# Altium PCB fanap.PcbDoc
Units mil, origin at the board's own origin, x right, y up, seen from the top; angles counter-clockwise.
Board outline 3111.08 x 2480.81 mil, 2 copper layers (Top Layer, Bottom Layer); 45 components, 29 nets, 162 pads, 19 vias.
Unrouted connection lines stored in the file: 1.
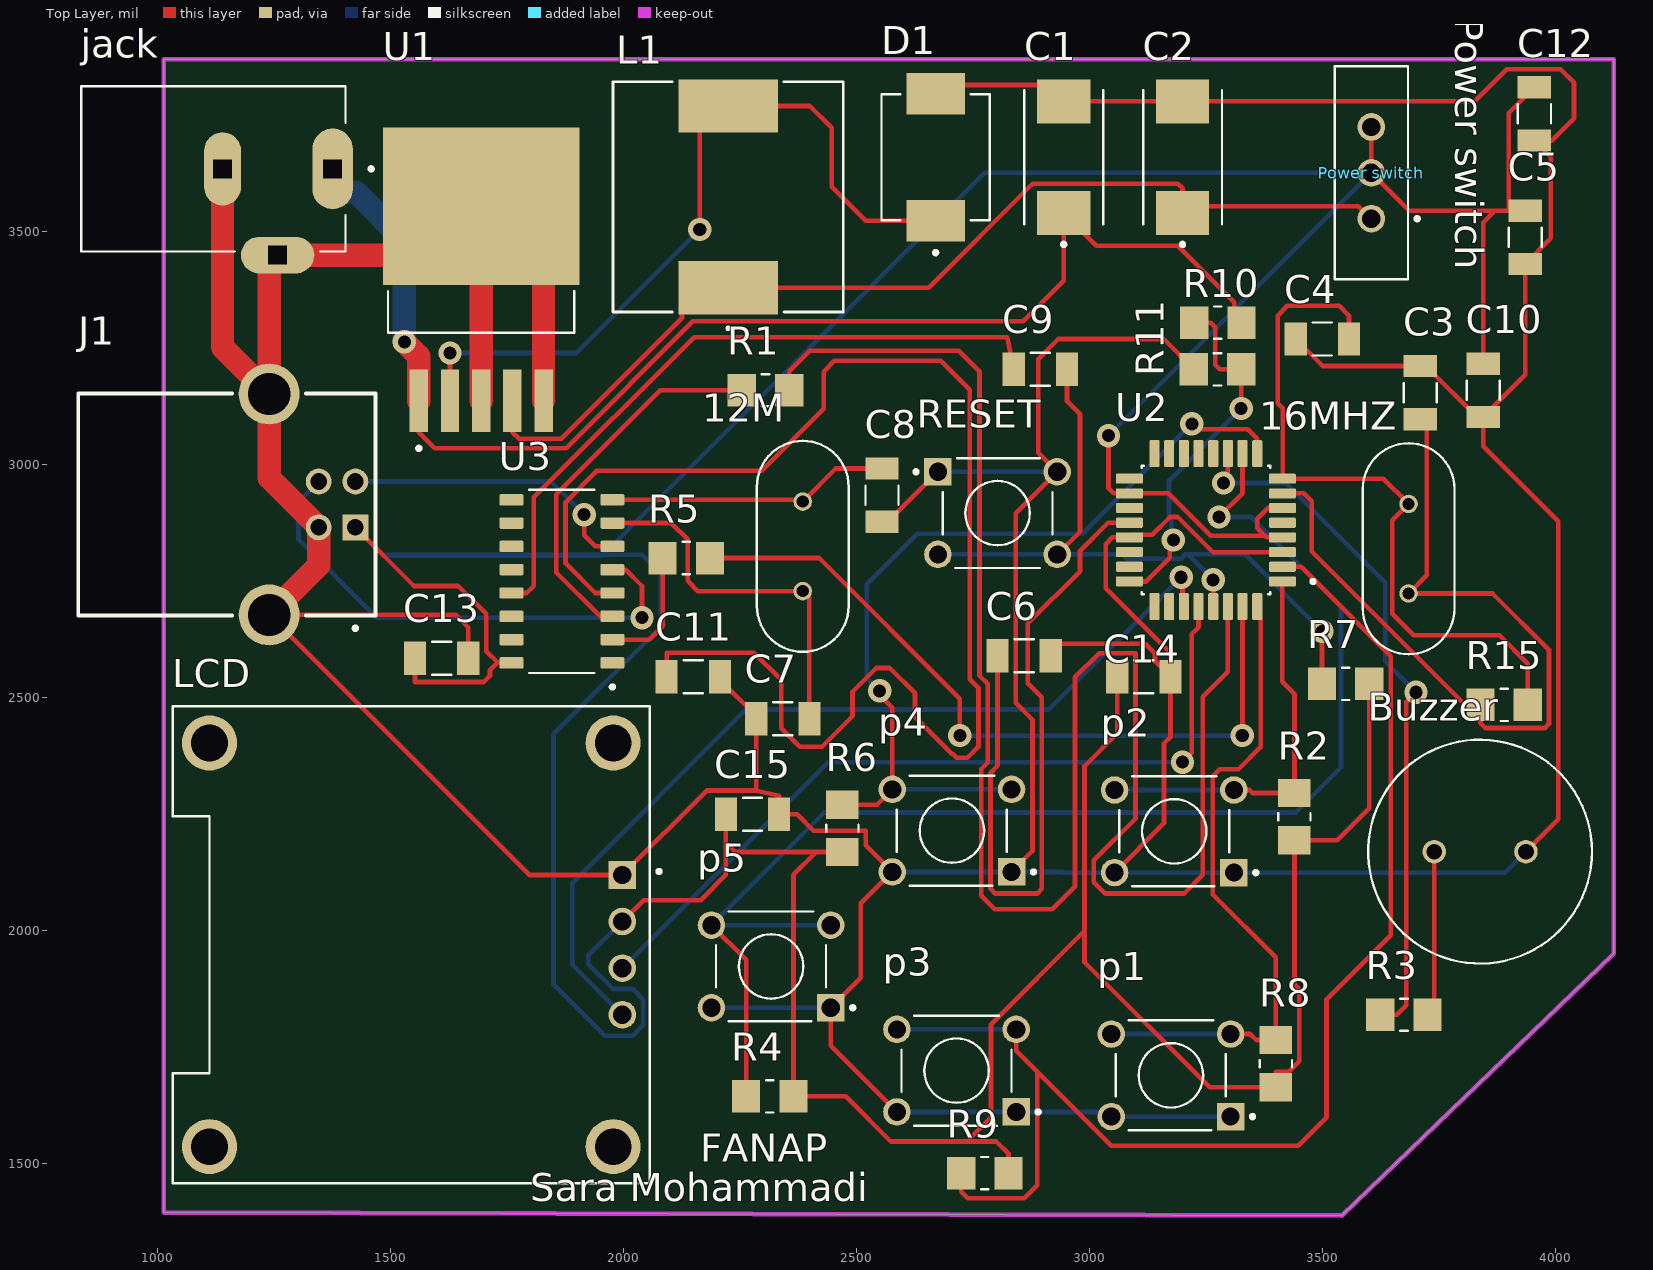
[diagram p0: Top Layer view]
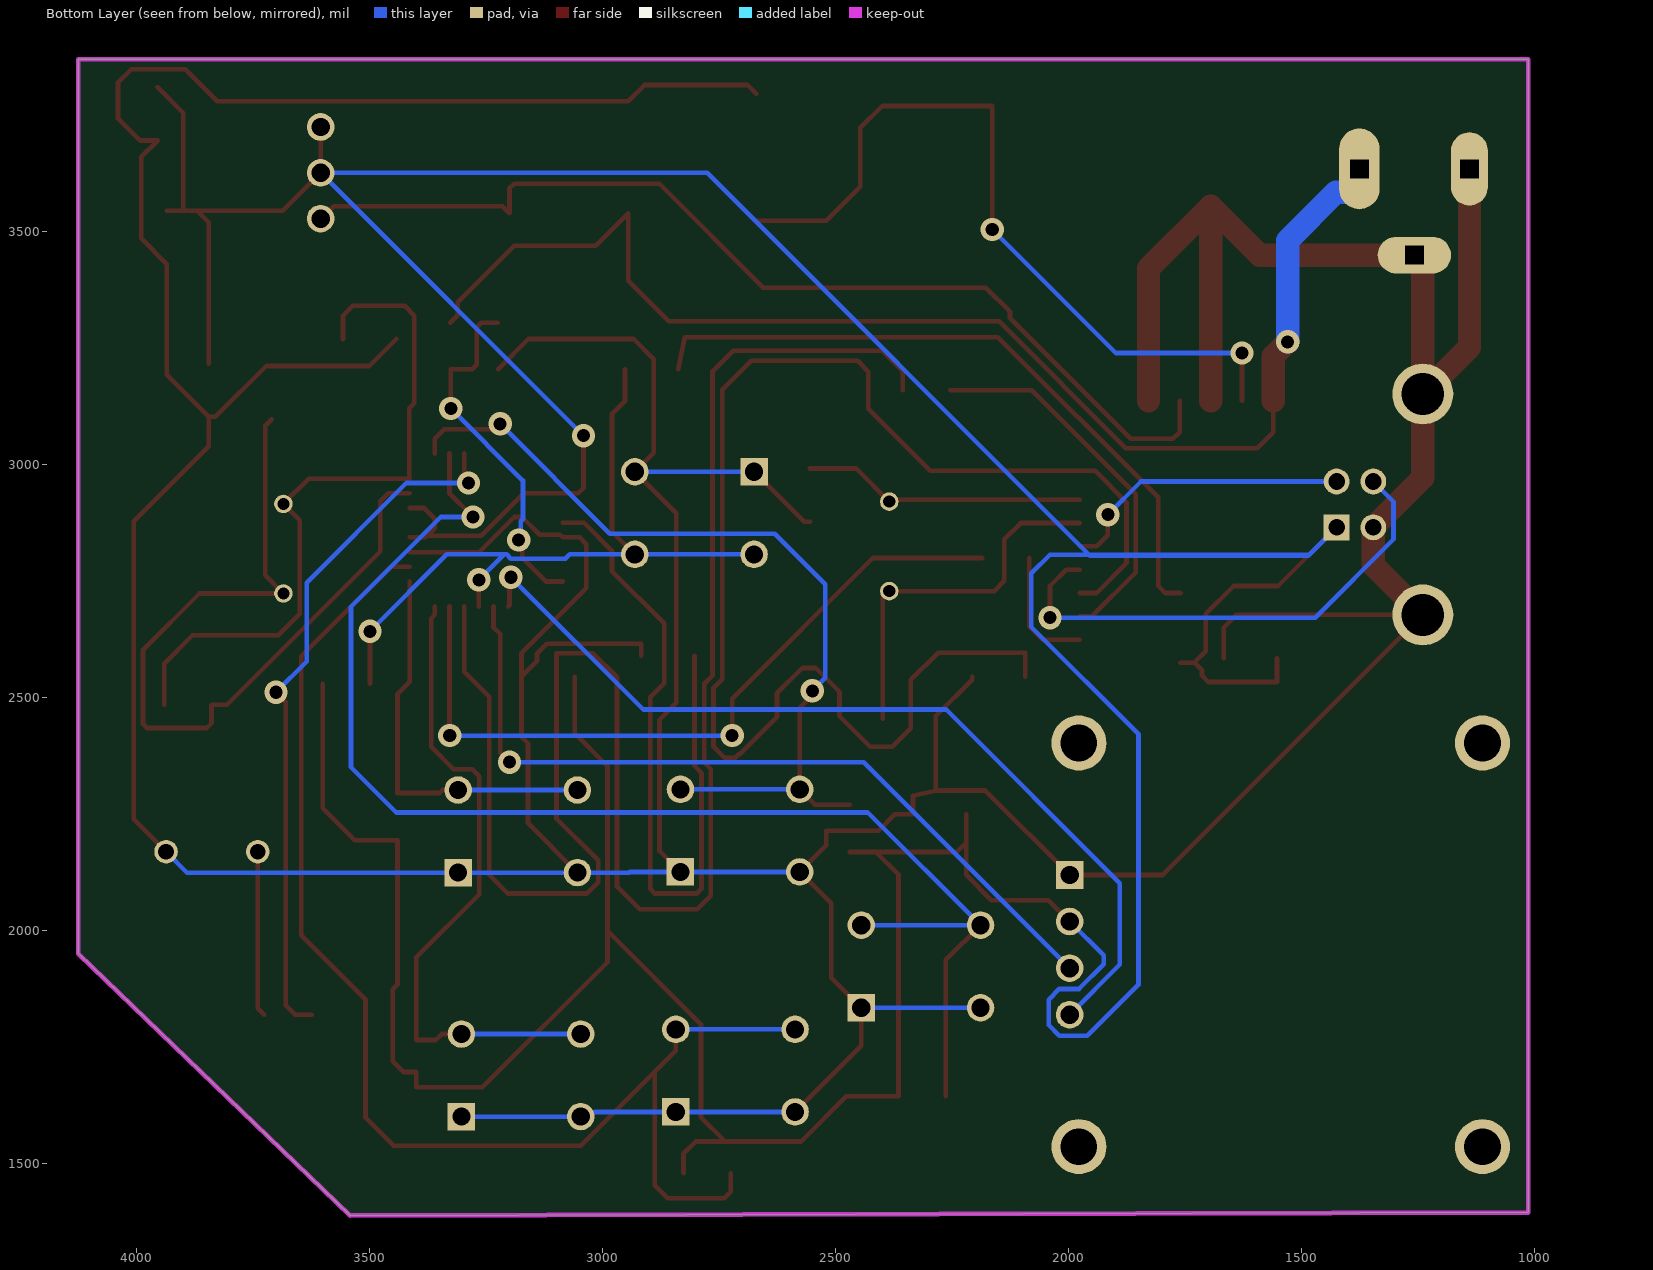
[diagram p1: Bottom Layer view, seen from below]
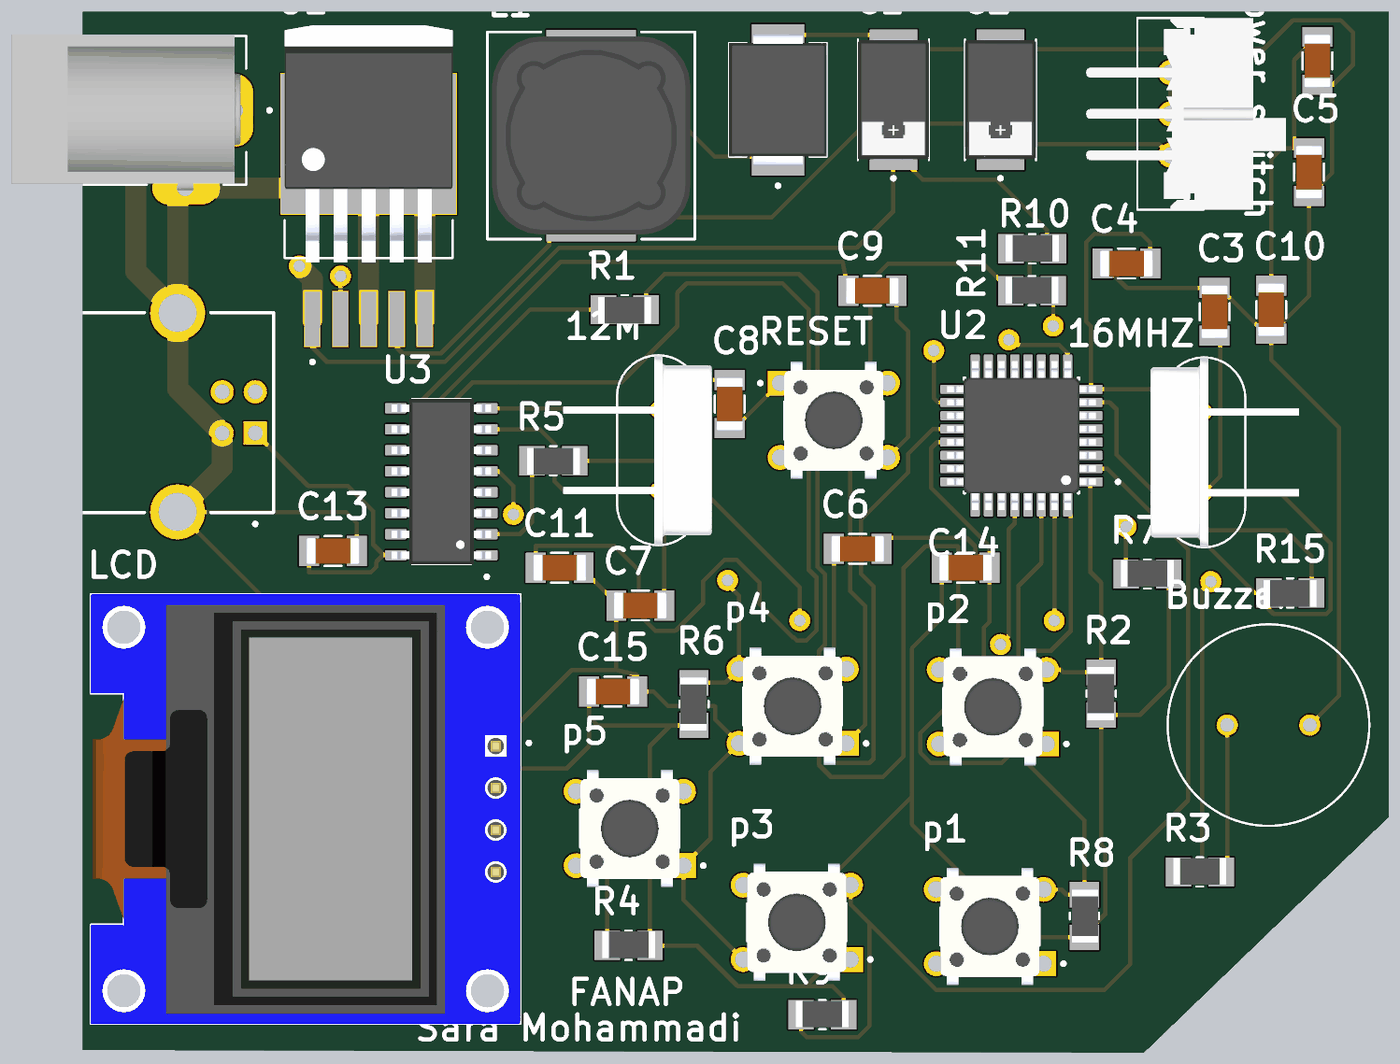
[diagram p2: 3D render of the assembled board from above, using the file's embedded part models]

## Layer stack, top to bottom
Top Solder: solder mask 0.4, Solder Resist, Dk 3.5
Top Layer: signal copper 1.4
Dielectric 1: dielectric 12.6, FR-4, Dk 4.8
Bottom Layer: signal copper 1.4
Bottom Solder: solder mask 0.4, Solder Resist, Dk 3.5

## Board outline
1013.92,1395.78 3541.46,1389.19 4125,1951.11 4125,3870 1013.92,3870

## Design rules (kind name [scope] priority, off if disabled: settings)
Clearance [All] p1: gap=10 ignorepadtopadclearanceinfootprint=FALSE
PolygonConnect [All] p1: connectstyle=Relief reliefconductorwidth=10 reliefentries=4 polygonreliefangle="90 Angle" airgapwidth=10
RoutingVias [All] p1: holewidth=28 width=50 viastyle="Through Hole" minholewidth=28 minwidth=50 maxholewidth=28 maxwidth=50
SolderMaskExpansion [All] p1: expansion=4 istentingtop=FALSE
SupplyNets "Schematic Supply Nets_1" [InNet('VCC')] p1: voltage=0.000
SupplyNets "Schematic Supply Nets" [InNet('GND')] p2: voltage=0.000
Width [All] p1: maxlimit=1000 minlimit=10 preferedwidth=10
30 further rules are at their usual default settings.

## Components (designator, comment, footprint, x,y, rotation, side; value= is the part's Value field where it differs from the comment)
12M "" XTAL_HC49P488W46L1150T500H350 2385,2825 r90 top
16MHZ "" XTAL_HC49P488W46L1150T500H350 3685,2820 r270 top
Buzzer "PS1240P02BT" XDCR_PS1240P02BT 3838.43,2170 r0 top
C1 "100uF,75V" CAP_20TDC100MYF 2945,3660 r90 top
C2 "1000uF,25V" CAP_20TDC100MYF 3200,3660 r90 top
C3 "" CAPC3216X180N 3710,3155 r270 top
C4 "" CAPC3216X180N 3500,3270 r0 top
C5 "" CAPC3216X180N 3935,3487.91 r270 top
C6 "" CAPC3216X180N 2860,2590 r0 top
C7 "" CAPC3216X180N 2342.09,2455 r0 top
C8 "" CAPC3216X180N 2555,2935 r90 top
C9 "" CAPC3216X180N 2895,3205 r0 top
C10 "" CAPC3216X180N 3845,3160 r270 top
C11 "" CAPC3216X180N 2150,2545 r0 top
C12 "" CAPC3216X180N 3955,3752.91 r270 top
C13 "" CAPC3216X180N 1610,2585 r0 top
C14 "" CAPC3216X180N 3117.09,2545 r0 top
C15 "" CAPC3216X180N 2277.09,2250 r0 top
D1 "1n5822" DIOM7959X265N 2670,3660 r90 top
J1 "USB-B-S-X-X-TH" SAMTEC_USB-B-S-X-X-TH 1240,2915 r270 top
jack "DC-005-5A-2.0" XKB_DC-005-5A-2.0 1140,3635 r0 top
L1 "150uH" IND_CDRH127/LDNP-470MC_SUM 2225,3575 r90 top
LCD "DM-OLED096-636" MODULE_DM-OLED096-636 1545,1970 r270 top
p1 "1825910-6" SW_1825910-6-4 3175,1690 r180 top
p2 "1825910-6" SW_1825910-6-4 3182.05,2213.58 r180 top
p3 "1825910-6" SW_1825910-6-4 2715,1700 r180 top
p4 "1825910-6" SW_1825910-6-4 2705,2215 r180 top
p5 "1825910-6" SW_1825910-6-4 2317.05,1923.58 r180 top
"Power switch" "EG1218" SW_EG1218 3605,3626.57 r90 top
R1 "PFC-W1206LF-12-1002-B" RESC3216X70N 2305,3160 r180 top
R2 "PFC-W1206LF-12-1002-B" RESC3216X70N 3440,2245 r90 top
R3 "PFC-W1206LF-12-1002-B" RESC3216X70N 3675,1820 r0 top
R4 "PFC-W1206LF-12-1002-B" RESC3216X70N 2314.21,1645 r0 top
R5 "PFC-W1206LF-12-1002-B" RESC3216X70N 2135,2800 r180 top
R6 "PFC-W1206LF-12-1002-B" RESC3216X70N 2470,2220 r90 top
R7 "PFC-W1206LF-12-1002-B" RESC3216X70N 3550,2530 r0 top
R8 "PFC-W1206LF-12-1002-B" RESC3216X70N 3400,1715 r270 top
R9 "PFC-W1206LF-12-1002-B" RESC3216X70N 2775.79,1480 r0 top
R10 "PFC-W1206LF-12-1002-B" RESC3216X70N 3275.79,3305 r0 top
R11 "PFC-W1206LF-12-1002-B" RESC3216X70N 3275,3205 r0 top
R15 "PFC-W1206LF-12-1002-B" RESC3216X70N 3890,2485 r180 top
RESET "1825910-6" SW_1825910-6-4 2802.95,2896.42 r0 top
U1 "LM2576S-5.0" VREG_TPS79625KTTR 1695,3555 r90 top
U2 "ATMEGA328P-AU" QFP80P900X900X120-32N 3250,2860 r180 top
U3 "CH340G" SOIC127P600X180-16N 1868.27,2750 r180 top

## Footprints (in the part's own frame and the unit in brackets; to place one, negate y for a bottom-side part, rotate by r counter-clockwise, add the part's x,y. Pads: shape width x height; smd on the part's side, far side on the other; paste and mask are expansions set on the pad)
CAP_20TDC100MYF [mm]
  rect 2.4x2.9 smd: 1(-3.05,0) 2(3.05,0)
  silkscreen extent -4.85,-2.15 3.65,2.15, body extent -3.65,-2.15 3.65,2.15, height 3
CAPC3216X180N [mm]
  rect 1.21x1.82 smd: 1(-1.45,0) 2(1.45,0)
  silkscreen extent -0.52,-0.9 0.52,0.9, body extent -1.6,-0.8 1.6,0.8, height 1.8
DIOM7959X265N [mm]
  rect 2.25x3.18 smd: A(3.455,0) C(-3.455,0)
  silkscreen extent -5.3,-2.95 3.44,2.95, body extent -3.98,-2.95 3.98,2.95, height 2.65
IND_CDRH127/LDNP-470MC_SUM [mil]
  rect 114x213 smd: 1(-195,0) 2(195,0)
  silkscreen extent -285,-247 247,247, body extent -236,-236 236,236, height 315
MODULE_DM-OLED096-636 [mm]
  rect 1.508x1.508 / inner round 1.508 / far side rect 1.508x1.508 hole 1: 1(-3.81,11.5)
  round 1.508 hole 1: 2(-1.27,11.5) 3(1.27,11.5) 4(3.81,11.5)
  round 3 hole 2: S1(-11,11) S2(11,11) S3(11,-11) S4(-11,-11)
  silkscreen extent -13,-13 13,13.6, body extent -13,-13 13,13, height 5.66
QFP80P900X900X120-32N [mm]
  rrect25% 1.47x0.55 smd: 1(-4.17,2.8) 2(-4.17,2) 3(-4.17,1.2) 4(-4.17,0.4) 5(-4.17,-0.4) 6(-4.17,-1.2) 7(-4.17,-2) 8(-4.17,-2.8) 17(4.17,-2.8) 18(4.17,-2) 19(4.17,-1.2) 20(4.17,-0.4) 21(4.17,0.4) 22(4.17,1.2) 23(4.17,2) 24(4.17,2.8)
  rrect25% 0.55x1.47 smd: 9(-2.8,-4.17) 10(-2,-4.17) 11(-1.2,-4.17) 12(-0.4,-4.17) 13(0.4,-4.17) 14(1.2,-4.17) 15(2,-4.17) 16(2.8,-4.17) 25(2.8,4.17) 26(2,4.17) 27(1.2,4.17) 28(0.4,4.17) 29(-0.4,4.17) 30(-1.2,4.17) 31(-2,4.17) 32(-2.8,4.17)
  silkscreen extent -5.94,-3.5 3.5,3.5, body extent -4.5,-4.5 4.5,4.5, height 1.2
RESC3216X70N [mm]
  rect 1.54x1.77 smd: 1(-1.29,0) 2(1.29,0)
  silkscreen extent -0.2,-0.88 0.2,0.88, body extent -1.6,-0.76 1.6,0.84, height 0.7
SAMTEC_USB-B-S-X-X-TH [mm]
  rect 1.408x1.408 / inner round 1.408 / far side rect 1.408x1.408 hole 0.9: 1(1.25,4.7)
  round 1.408 hole 0.9: 2(-1.25,4.7) 3(-1.25,2.7) 4(1.25,2.7)
  round 3.316 hole 2.3: S1(-6.02,0) S2(6.02,0)
  silkscreen extent -6.05,-10.4 6.85,5.8
SOIC127P600X180-16N [mm]
  rrect25% 1.31x0.62 smd: 1(-2.75,4.445) 2(-2.75,3.175) 3(-2.75,1.905) 4(-2.75,0.635) 5(-2.75,-0.635) 6(-2.75,-1.905) 7(-2.75,-3.175) 8(-2.75,-4.445) 9(2.75,-4.445) 10(2.75,-3.175) 11(2.75,-1.905) 12(2.75,-0.635) 13(2.75,0.635) 14(2.75,1.905) 15(2.75,3.175) 16(2.75,4.445)
  silkscreen extent -2.85,-5 1.77,5.85, body extent -3,-5 3,5, height 1.8
SW_1825910-6-4 [mm]
  rect 1.498x1.498 / inner round 1.498 / far side rect 1.498x1.498 hole 0.99: 1(-3.25,2.25)
  round 1.498 hole 0.99: 2(3.25,2.25) 3(-3.25,-2.25) 4(3.25,-2.25)
  silkscreen extent -4.54,-3 3,3, body extent -3,-3.9 3,3.9, height 5.01
SW_EG1218 [mm]
  round 1.508 hole 1: 1(-2.5,0) 2(0,0) 3(2.5,0)
  silkscreen extent -5.8,-2.6 5.8,2, body extent -5.8,-7 5.8,5.1, height 2
VREG_TPS79625KTTR [mm]
  rect 3.4x1 smd paste-0.05 mask+0.07: 1(-10.6,3.4) 2(-10.6,1.7) 3(-10.6,0) 4(-10.6,-1.7) 5(-10.6,-3.4)
  rect 8.6x10.7 smd paste-0.05 mask+0.07: 6(0,0)
  silkscreen extent -13.3,-5.08 -4.62,5.08, body extent -7.18,-5.08 7.18,5.08, height 4.65
XDCR_PS1240P02BT [mm]
  round 1.28 hole 0.85: 1(-2.5,0) 2(2.5,0)
  silkscreen extent -6.1,-6.1 6.1,6.1
XKB_DC-005-5A-2.0 [mm]
  oval 2.2x4.4 hole 1 square: 1(6,0)
  oval 2x4 hole 1 square: 2(0,0)
  oval 4x2 hole 1 square: 3(3,-4.7)
  silkscreen extent -7.7,-4.5 8.2,4.5, body extent -7.51,-4.83 6.49,4.57, height 5.5
XTAL_HC49P488W46L1150T500H350 [mil]
  round 39.65 hole 25.87: 1(-96.06,0) 2(96.06,0)
  silkscreen extent -226,-98 226,98, body extent -226,-128 226,226, height 98

## Part data
12M 16MHZ: library part ABL-16.000MHZ-B2-T, "HC/49US (AT49) MICROPROCESSOR CRYSTAL", Package="HC-49/US ABRACON", Availability="In Stock", Check_prices=https://www.snapeda.com/parts/ABL-16.000MHZ-B2/Abracon+LLC/view-part/?ref=eda, MF=Abracon, MP=ABL-16.000MHZ-B2, Price=None, Purchase-URL=https://pricing.snapeda.com/search/part/ABL-16.000MHZ-B2/?ref=eda, SnapEDA_Link=https://www.snapeda.com/parts/ABL-16.000MHZ-B2/Abracon+LLC/view-part/?ref=snap
Buzzer: "Buzzers Transducer, Externally Driven Piezo 3V 4kHz 60dB @ 3V, 10cm Through Hole PC Pins", Package="2020 TDK", Availability=Unavailable, MF=TDK, MP=PS1240P02BT, Price=None, SnapEDA_Link=https://www.snapeda.com/parts/PS1240P02BT/TDK/view-part/53420/?ref=snap
C1: library part 20TDC100MYF, "Cap Tant Polymer 100uF 20VDC D3L CASE 20% (7.3 X 4.3 X 2.8mm) SMD 0.055 Ohm 125Â°C T/R", Package="7343-2 Panasonic", Availability="In Stock", Check_prices=https://www.snapeda.com/parts/20TDC100MYF/Panasonic/view-part/?ref=eda, MF="Panasonic Electronic Components", MP=20TDC100MYF, Price=None, Purchase-URL=https://pricing.snapeda.com/search/part/20TDC100MYF/?ref=eda, SnapEDA_Link=https://www.snapeda.com/parts/20TDC100MYF/Panasonic/view-part/?ref=snap
C2: library part 20TDC100MYF, Package="7343-2 Panasonic", Availability="In Stock", Check_prices=https://www.snapeda.com/parts/20TDC100MYF/Panasonic/view-part/?ref=eda, MF="Panasonic Electronic Components", MP=20TDC100MYF, Price=None, Purchase-URL=https://pricing.snapeda.com/search/part/20TDC100MYF/?ref=eda, SnapEDA_Link=https://www.snapeda.com/parts/20TDC100MYF/Panasonic/view-part/?ref=snap
C3 C4 C5 C6 C7 C8 C9 C10 C11 C12 C13 C14 C15: library part GRM31C5C1H104JA01K, "SMD Capacitor C0G(EIA) with Capacitance: 0.10uF Tol. 5%. Rated Voltage: 50Vdc", Package="3216 Murata", Check_prices=https://www.snapeda.com/parts/GRM31C5C1H104JA01K/Murata/view-part/1759130/?ref=eda, Digi-Key_Part_Number=490-8335-1-ND, MF=Murata, MP=GRM31C5C1H104JA01K, Purchase-URL=https://pricing.snapeda.com/search/part/GRM31C5C1H104JA01K/?ref=eda, SnapEDA_Link=https://www.snapeda.com/parts/GRM31C5C1H104JA01K/Murata/view-part/1759130/?ref=snap
D1: library part SS34, "Diode Schottky 40 V 3A Surface Mount SMC (DO-214AB)", Package="SMC-2 ON Semiconductor", Check_prices=https://www.snapeda.com/parts/SS34/Onsemi/view-part/?ref=eda, ComponentLink1Description=Link, ComponentLink1URL=https://ickala.com/schottky-diode/17325-1n5822-smd-sizea.html, MF=onsemi, MP=SS34, SnapEDA_Link=https://www.snapeda.com/parts/SS34/Onsemi/view-part/?ref=snap
J1: "USB-B (USB TYPE-B) USB 2.0 Receptacle Connector 4 Position Through Hole, Right Angle", Package=None, Check_prices=https://www.snapeda.com/parts/USB-B-S-F-W-TH-TR/Samtec/view-part/?ref=eda, MF=Samtec, MP=USB-B-S-F-W-TH-TR, SnapEDA_Link=https://www.snapeda.com/parts/USB-B-S-F-W-TH-TR/Samtec/view-part/?ref=snap
jack: "DC Power Receptacle Jack, Through Holeï¼ŒRight Angle", Package=Package, Check_prices=https://www.snapeda.com/parts/DC-005-5A-2.0/XKB+Industrial+Precision/view-part/?ref=eda, MF="XKB Industrial Precision", MP=DC-005-5A-2.0, SnapEDA_Link=https://www.snapeda.com/parts/DC-005-5A-2.0/XKB+Industrial+Precision/view-part/?ref=snap
L1: library part CDRH127/LDNP-470MC, "12*12", Package="Nonstandard Sumida", Availability="In Stock", Check_prices=https://www.snapeda.com/parts/CDRH127/LDNP-470MC/Sumida+America+Components+Inc./view-part/?ref=eda, ComponentLink1Description=link, ComponentLink1URL=https://ickala.com/power-inductor-1212/44388-rh127-150uh.html, MF="Sumida America", MP=CDRH127/LDNP-470MC, Price=None, Purchase-URL=https://pricing.snapeda.com/search/part/CDRH127/LDNP-470MC/?ref=eda, SnapEDA_Link=https://www.snapeda.com/parts/CDRH127/LDNP-470MC/Sumida+America+Components+Inc./view-part/?ref=snap
LCD: "0.96â€ 128 X 64 MONOCHROME GRAPHIC OLED DISPLAY MODULE - I2C", Package=Package, Check_prices=https://www.snapeda.com/parts/DM-OLED096-636/Display+Module/view-part/?ref=eda, MF="Display Module", MP=DM-OLED096-636, SnapEDA_Link=https://www.snapeda.com/parts/DM-OLED096-636/Display+Module/view-part/?ref=snap
p1 p2 p3 p4 p5 RESET: "Switch Push Button OFF (ON) SPST Round Button 0.05A 24VDC Momentary Contact PC Pins Thru-Hole", Package=None, Check_prices=https://www.snapeda.com/parts/1825910-6/TE+Connectivity+ALCOSWITCH+Switches/view-part/?ref=eda, Digi-Key_Part_Number=450-1650-ND, MF="TE Connectivity", MP=1825910-6, Purchase-URL=https://pricing.snapeda.com/search/part/1825910-6/?ref=eda, SnapEDA_Link=https://www.snapeda.com/parts/1825910-6/TE+Connectivity+ALCOSWITCH+Switches/view-part/?ref=snap
"Power switch": "Slide Switch, EG Series, SPDT, Non-Shorting, ON-ON, 200mA DC, 30VDC, PC Pin", Package=None, Check_prices=https://www.snapeda.com/parts/EG1218/E-Switch/view-part/?ref=eda, MF=E-Switch, MP=EG1218, SnapEDA_Link=https://www.snapeda.com/parts/EG1218/E-Switch/view-part/?ref=snap
R1 R2 R3 R4 R5 R6 R7 R8 R9 R10 R11 R15: "Thin Film Resistors - SMD 10K OHM .1% 10PPM", Package="1206 International Resistive", Availability=Unavailable, MF="International Resistive", MP=PFC-W1206LF-12-1002-B, Price=None, SnapEDA_Link=https://www.snapeda.com/parts/PFC-W1206LF-12-1002-B/International%20Resistive/view-part/1192591/?ref=snap
U1: "SIMPLE SWITCHER&reg; 40V, 3A Low Component Count Step-Down Regulator 5-DDPAK/TO-263 -40 to 125", Package="TO-263-5 Texas Instruments", Availability="In Stock", Check_prices=https://www.snapeda.com/parts/LM2576S-5.0/Texas+Instruments/view-part/?ref=eda, ComponentLink1Description=link, ComponentLink1URL=https://roboeq.ir/products/detail/0306088/%D8%B1%DA%AF%D9%88%D9%84%D8%A7%D8%AA%D9%88%D8%B1-5-%D9%88%D9%84%D8%AA-LM2576S-SMD/, MF="Texas Instruments", MP=LM2576S-5.0, Price=None, Purchase-URL=https://pricing.snapeda.com/search/part/LM2576S-5.0/?ref=eda, SnapEDA_Link=https://www.snapeda.com/parts/LM2576S-5.0/Texas+Instruments/view-part/?ref=snap
U2: "AVR AVRÂ® ATmega Microcontroller IC 8-Bit 20MHz 32KB (16K x 16) FLASH 32-TQFP (7x7)", Package="TQFP-32 Microchip", Check_prices=https://www.snapeda.com/parts/ATMEGA328P-AU/Microchip/view-part/?ref=eda, MF=Microchip, MP=ATMEGA328P-AU, SnapEDA_Link=https://www.snapeda.com/parts/ATMEGA328P-AU/Microchip/view-part/?ref=snap
U3: "USB Interface Integrated Circuit", Package=None, Availability="Not in stock", Check_prices=https://www.snapeda.com/parts/Ch340G/WCH/view-part/?ref=eda, MF=WCH, MP=Ch340G, Price=None, SnapEDA_Link=https://www.snapeda.com/parts/Ch340G/WCH/view-part/?ref=snap

## Via types
v1: diameter 50, hole 28, Top Layer to Bottom Layer, 19 vias

## Nets (pads, with @x,y where several pads share a name; then routed paths per layer and width w, separated by ;. In a path a pad name is that pad's centre, name@x,y a point inside that pad or via, vN(x,y) a via of type N, cw(c..) or ccw(c..) an arc to the next point about the centre after c; other vN are vias at no path point)
12v: C1.1 jack.1 R10.2 U1.1 | length 2848.5
  Top Layer w10: U1.1 1561.14,3070 1595.39,3035.75 1877.04,3035.75 2149.29,3308 2858,3308 2945,3395 C1.1 3014.92,3470 3190,3470 3311.02,3348.98 3311.02,3320.56 R10.2
  Top Layer w50: v1(1530,3264) 1561.14,3232.86 U1.1
  Bottom Layer w50: jack.1 1376.22,3601.6 1393.13,3584.69 1426.53,3584.69 1530,3481.22 v1(1530,3264)
Bat: R10.1 R11.2 U2.24 | length 772.4
  Top Layer w10: U2.24 3121.76,2749.76 3172.63,2800.63 3172.63,2831.06 v1(3180.28,2838.72) ; R10.1 3260,3305 3270,3295 3270,3215 3280,3205 R11.2 v1(3325.79,3121)
  Bottom Layer w10: v1(3180.28,2838.72) 3176,2843 3176,2878.72 3171,2883.72 3171,2966.21 v1(3325.79,3121)
Buzzer: R3.1 U2.11 | length 1509.8
  Top Layer w10: v1(3288,2961) 3297.24,2970.24 U2.11 ; R3.1 3660,1820 3680,1840 3680,2491 v1(3701,2512)
  Bottom Layer w10: v1(3288,2961) 3421,2961 3635,2747 3635,2578 v1(3701,2512)
D+: J1.3 U3.5 | length 1094.7
  Top Layer w10: U3.5 2005,2775 2040,2740 v1(2040,2672)
  Bottom Layer w10: J1.3 1303,2920.91 1303,2840 1471,2672 v1(2040,2672)
D-: J1.2 U3.6 | length 634.9
  Top Layer w10: v1(1916,2893) 1916,2849 1940,2825 U3.6
  Bottom Layer w10: J1.2 1844.79,2964.21 v1(1916,2893)
DTR: C9.1 U3.13 | length 1473
  Top Layer w10: U3.13 1793,2725 1808,2740 1808,2929.98 2152.02,3274 2823.91,3274 C9.1
GND: Buzzer.2 C1.2 C2.2 C3.1 C4.1 C5.2 C6.2 C7.1 C8.1 C10.2 C11.2 C12.2 C13.2 C14.2 C15.2 D1.A J1.4 J1.S1 J1.S2 jack.2 jack.3 LCD.1 p1.1 p1.2 p2.1 p2.2 p3.1 p3.2 p4.1 p4.2 p5.1 p5.2 R11.1 RESET.1 RESET.2 U1.3 U1.5 U1.6 U2.3 U2.5 U2.21 | length 15617.5
  Top Layer w10: jack.3@1240,3431.85 jack.3 ; C13.2 1667.09,2650.91 1640,2677.99 J1.S2 1797.99,2120 LCD.1 2178.76,2301 2285,2301 ; C11.2 2207.09,2538.91 2285,2461 C7.1 2285,2301 ; C8.1 2567.01,2877.91 2649.61,2960.51 2650.51,2960.51 RESET.1 ; p3.2 2445,1753.47 p5.1 2509.49,1899.49 2509.49,2058.86 p4.2 2520,2183.47 2520,2215 2408,2215 2373,2250 C15.2 2334.17,2290 2285,2301 ; D1.A 2688.98,3815 2910.08,3815 C1.2 C2.2 3827.08,3780.08 3896,3849 4011,3849 4040,3820 4040,3744 3991.83,3695.83 C12.2 3990,3660.83 3990,3485.83 C5.2 3935,3192.91 C10.2 ; p4.1 2878,2171.47 2878,2453 2841.8,2489.2 2841.8,2895.89 RESET.2 2890,3025.91 2890,3227 2933,3270 3159.21,3270 R11.1 ; C6.2 2917.09,2615.83 3120,2615.83 3140.93,2594.9 3140.93,2578.24 C14.2 ; p2.2 3160,2230.91 3160,2402 3174.17,2416.17 C14.2 ; U2.3 3265.24,2812.76 3190,2888 3173,2888 3134.92,2849.92 3091.5,2849.92 U2.21 3049.25,2844.25 3035,2830 3035,2735.17 3174.17,2596 C14.2 ; C4.1 3500.83,3212.09 C3.1 3722,3212.09 3831.17,3102.91 C10.2 ; Buzzer.2 4006.1,2239.25 4006.1,2878.9 3845,3040 C10.2
  Top Layer w50: jack.2 1140,3252.01 J1.S1 ; J1.S2 1346.3,2784.29 J1.4 1240,2972.09 J1.S1 ; jack.3@1240,3431.85 J1.S1 ; jack.3 1589.96,3449.96 U1.6 ; U1.3 U1.6 ; U1.5 1828.86,3421.14 U1.6
  Bottom Layer w10: p5.2 p5.1 ; p4.2 p4.1 2942,2126.42 2943.42,2125 p2.2 p2.1 3891.85,2125 Buzzer.2 ; p3.2 p3.1 3016.7,1611.42 3017.33,1610.79 3037.68,1610.79 p1.2 p1.1 ; RESET.1 RESET.2
Net12M_1: 12M.1 C7.2 U3.7 | length 800.9
  Top Layer w10: U3.7 2103,2875 2138,2840 2138,2750.94 2160,2728.94 12M.1 2399.17,2714.76 C7.2
Net12M_2: 12M.2 C8.2 U3.8 | length 609.5
  Top Layer w10: U3.8 2381.06,2925 12M.2 2456.02,2992.09 C8.2
Net16MHZ_1: 16MHZ.1 C4.2 R15.1 U2.8 | length 1541.9
  Top Layer w10: U2.8 U2.8@3415,2970.24 ; C4.2 3557.09,3320 3536.09,3341 3425,3341 3404,3320 3404,3132 3415,3121 U2.8@3415,2970.24 ; R15.1 3940.79,2573.21 3880,2634 3696,2634 3650,2680 3650,2881.06 16MHZ.1 3630.83,2970.24 U2.8@3415,2970.24
Net16MHZ_2: 16MHZ.2 C3.2 R15.2 U2.7 | length 1776.3
  Top Layer w10: U2.7 3460,2938.74 3477,2921.74 3477,2814 3806,2485 R15.2 3839.21,2445.94 3850,2435.16 3965.16,2435.16 3977.32,2435.16 3986.1,2443.94 3986.1,2456.1 3986.1,2602.9 3865.06,2723.94 16MHZ.2 3724,2762.94 3724,3083.91 C3.2
NetBuzzer_1: Buzzer.1 R3.2 | length 355.9
  Top Layer w10: R3.2 3740,1834.21 Buzzer.1
NetC2_1: "Power switch.1" C2.1 L1.1 U1.4 | length 2225.8
  Top Layer w10: U1.4 1761.93,3070 1776.18,3055.75 1867.04,3055.75 2125.79,3314.5 2125.79,3328 2177.79,3380 2655,3380 2878,3603 3190,3603 3200,3593 C2.1 3215.08,3555 3576.94,3555 3603.79,3528.15 3605,3528.15
NetC6_1: C6.1 U2.20 | length 1539.7
  Top Layer w10: C6.1 2802.91,2353.91 2788,2339 2788,2090 2798,2080 2888,2080 2898,2090 2898,2501 2868,2531 2868,2660 2980,2772 2980,2815.75 3040,2875.75 U2.20
NetC9_2: C9.2 R7.1 RESET.3 RESET.4 U2.29 | length 1576.7
  Top Layer w10: RESET.4 2980,2856.93 2980,3108.91 2952.09,3136.83 C9.2 ; U2.29 v1(3265.75,2753.09) ; R7.1 v1(3499.21,2642.79)
  Bottom Layer w10: RESET.3 RESET.4 3070.63,2807.83 3079.75,2798.72 3196.85,2798.72 3205.97,2807.83 3211,2807.83 ; v1(3265.75,2753.09) 3211,2807.83 ; v1(3499.21,2642.79) 3334.17,2807.83 3211,2807.83
NetC11_1: C11.1 U3.4 | length 3183.2
  Top Layer w10: U3.4 1940,2725 1876,2789 1876,2920 1943,2987 2297,2987 2430,3120 2430,3200 2453,3223 2681,3223 2743,3161 2743,2540 2743.77,2540 2762,2521.77 2762,2395.22 2738.5,2371.72 2715,2371.72 2707.72,2379 2705.43,2379 2626,2458.43 2626,2510 2572,2564 2542.43,2564 2491.72,2513.28 2491.72,2460.49 2426.23,2395 2378.32,2395 2338.5,2434.82 2338.5,2538.5 2280,2597 2092.91,2597 C11.1
NetD1_C: D1.C L1.2 U1.2 | length 1694.7
  Top Layer w10: U1.2 v1(1628.07,3240) ; v1(2164,3505) 2164,3770 L1.2 2400,3770 2447,3723 2447,3596.98 2520,3523.98 D1.C
  Bottom Layer w10: v1(1628.07,3240) 1899,3240 v1(2164,3505)
NetR1_1: R1.1 U2.30 | length 3845.3
  Top Layer w10: R1.1 2355.79,3200.79 2400,3245 2720,3245 2764.1,3200.9 2764.1,2547.96 2782,2530.06 2782,2361.28 2768,2347.28 2768,2075 2797,2046 2920,2046 2969,2095 2969,2543.83 3021,2595.83 3099,2595.83 3099,2241 3009.6,2151.6 3009.6,2104.4 3034,2080 3203,2080 3243,2120 3243,2502 3297.24,2556.24 U2.30
NetR5_1: R5.1 U2.31 | length 1623.4
  Top Layer w10: R5.1 2420,2800 2722,2498 v1(2722,2419) ; v1(3328,2419) 3328.74,2419.74 U2.31
  Bottom Layer w10: v1(2722,2419) v1(3328,2419)
P1: p1.3 p1.4 R8.1 U2.32 | length 1413.5
  Top Layer w10: p1.3 3345,1778.58 3357.79,1765.79 R8.1 3400,1943 3265,2078 3265,2332 3280,2347 3320,2347 3368,2395 3368,2670.24 3360.24,2678 U2.32
  Bottom Layer w10: p1.4 p1.3
P2: p2.3 p2.4 R2.2 U2.1 | length 853.2
  Top Layer w10: p2.3 3343.62,2302.17 3350,2295.79 R2.2 3440,2509 3414.17,2534.83 U2.1
  Bottom Layer w10: p2.4 p2.3
P3: p3.3 p3.4 R9.1 U2.2 | length 2900.1
  Top Layer w10: R9.1 2725,1440 2739,1426 2860,1426 2888,1454 2888,1697.55 ; p3.3 2842.95,1742.6 3046.55,1539 3448,1539 3509,1600 3509,1853 3647,1991 3647,2589 3454.74,2781.26 U2.2
  Bottom Layer w10: p3.4 p3.3
P4: p4.3 p4.4 R6.2 U2.9 | length 1865
  Top Layer w10: R6.2 2544.25,2270.79 p4.4 2577.05,2478.41 2550,2505.46 v1(2550,2515) ; v1(3220,3088) 3232,3076 3340,3076 3360.24,3055.76 U2.9
  Bottom Layer w10: v1(2550,2515) 2550,2515.57 2522,2543.57 2522,2743.32 2631,2852.32 2984.32,2852.32 v1(3220,3088) ; p4.4 p4.3
P5: p5.3 p5.4 R4.1 U2.10 | length 2988.3
  Top Layer w10: p5.4 2263.43,1937.83 R4.1 ; v1(3278,2888) 3328.74,2938.74 U2.10
  Bottom Layer w10: p5.3 p5.4 2430.93,2254 3443,2254 3540,2351 3540,2695 3347,2888 v1(3278,2888)
RX: R5.2 U3.2 | length 265.7
  Top Layer w10: U3.2 2055.27,2625 2084.21,2653.95 R5.2
SCL: LCD.3 U2.28 | length 1733.3
  Top Layer w10: v1(3200,2362) 3220,2382 3220,2637 3234.25,2651.25 U2.28
  Bottom Layer w10: LCD.3 2439.76,2362 v1(3200,2362)
SDA: LCD.4 U2.27 | length 1970.9
  Top Layer w10: v1(3197,2758.72) 3199.88,2755.84 3199.88,2698.7 U2.27
  Bottom Layer w10: LCD.4 1890,1927.76 1890,2102 2263,2475 2913,2475 3196.72,2758.72 v1(3197,2758.72)
TX: R1.2 U3.3 | length 818
  Top Layer w10: U3.3 1950,2675 1856,2769 1856,2936.96 2079.04,3160 R1.2
VCC: "Power switch.2" "Power switch.3" C5.1 C10.1 C12.1 C13.1 C14.1 C15.1 J1.1 LCD.2 R2.1 R4.2 R6.1 R7.2 R8.2 R9.2 U2.4 U2.6 U2.18 U3.16 | length 12549.3
  Top Layer w10: J1.1 1550.83,2740 1646,2740 1706,2680 1706,2600 1731,2575 ; C13.1 1552.91,2534 1700,2534 1714,2548 1714,2560 1729,2575 1731,2575 ; U3.16 1731,2575 ; LCD.2 2043.76,2066 2166,2066 2220,2120 2220,2189.21 ; C15.1 2220,2189.21 ; R6.1 2414.21,2169.21 ; R9.2 2826.57,1521.43 2800,1548 2737,1548 ; v1(3041,3062.57) 3041,2950 3052.26,2938.74 U2.18 3169.26,2938.74 3260,2848 3376.29,2848 ; C14.1 3060,2424 2989.6,2353.6 2989.6,2000 ; U2.4 3380.03,2844.25 3376.29,2848 ; U2.6 3382.96,2907.24 3360,2884.29 3360,2864.29 3376.29,2848 ; R7.2 3600.79,2263 3532,2194.21 R2.1 3440,1885 3450,1875 3450,1720 3427,1697 3400,1697 R8.2 3258,1664.21 2989.6,1932.61 2989.6,2000 ; 3605,3725 3605,3626.57 3686.57,3545 3870,3545 ; C10.1 3845,3520 3870,3545 ; C5.1 C5.1@3900,3545 ; C12.1 3900,3755 C5.1@3900,3545 ; 2220,2189.21 2240,2169.21 2414.21,2169.21 ; 2414.21,2169.21 2365,2120 R4.2 2477,1645 2574,1548 2737,1548 ; 2737,1548 2789,1600 2789,1799.4 2989.6,2000 ; 3870,3545 C5.1@3900,3545
  Bottom Layer w10: J1.1 J1.1@1437.83,2853 ; LCD.2 1925,1947.24 1925,1928.07 1977.76,1875.31 2020,1875.31 2043,1852.31 2043,1798 2020,1775 1960,1775 1850,1885 1850,2422 2080,2652 2080,2767 2040,2807 1954.21,2807 1483.83,2807 J1.1@1437.83,2853 ; v1(3041,3062.57) 3605,3626.57 2775.79,3626.57 1954.21,2805 1485.83,2805 J1.1@1437.83,2853
pads on no net: LCD.S1 LCD.S2 LCD.S3 LCD.S4 U2.12 U2.13 U2.14 U2.15 U2.16 U2.17 U2.19 U2.22 U2.23 U2.25 U2.26 U3.1 U3.9 U3.10 U3.11 U3.12 U3.14 U3.15

## Keep-outs
Keep-Out Layer:
  the board outline again, w10

## Silkscreen, mask and mechanical layers (free items; w line width, h text height)
Top Overlay:
  text "FANAP" at 2165,1505 h60
  text "Sara Mohammadi" at 1800,1420 h60